# EAGLE board finalboard (EAGLE 8.7.1)
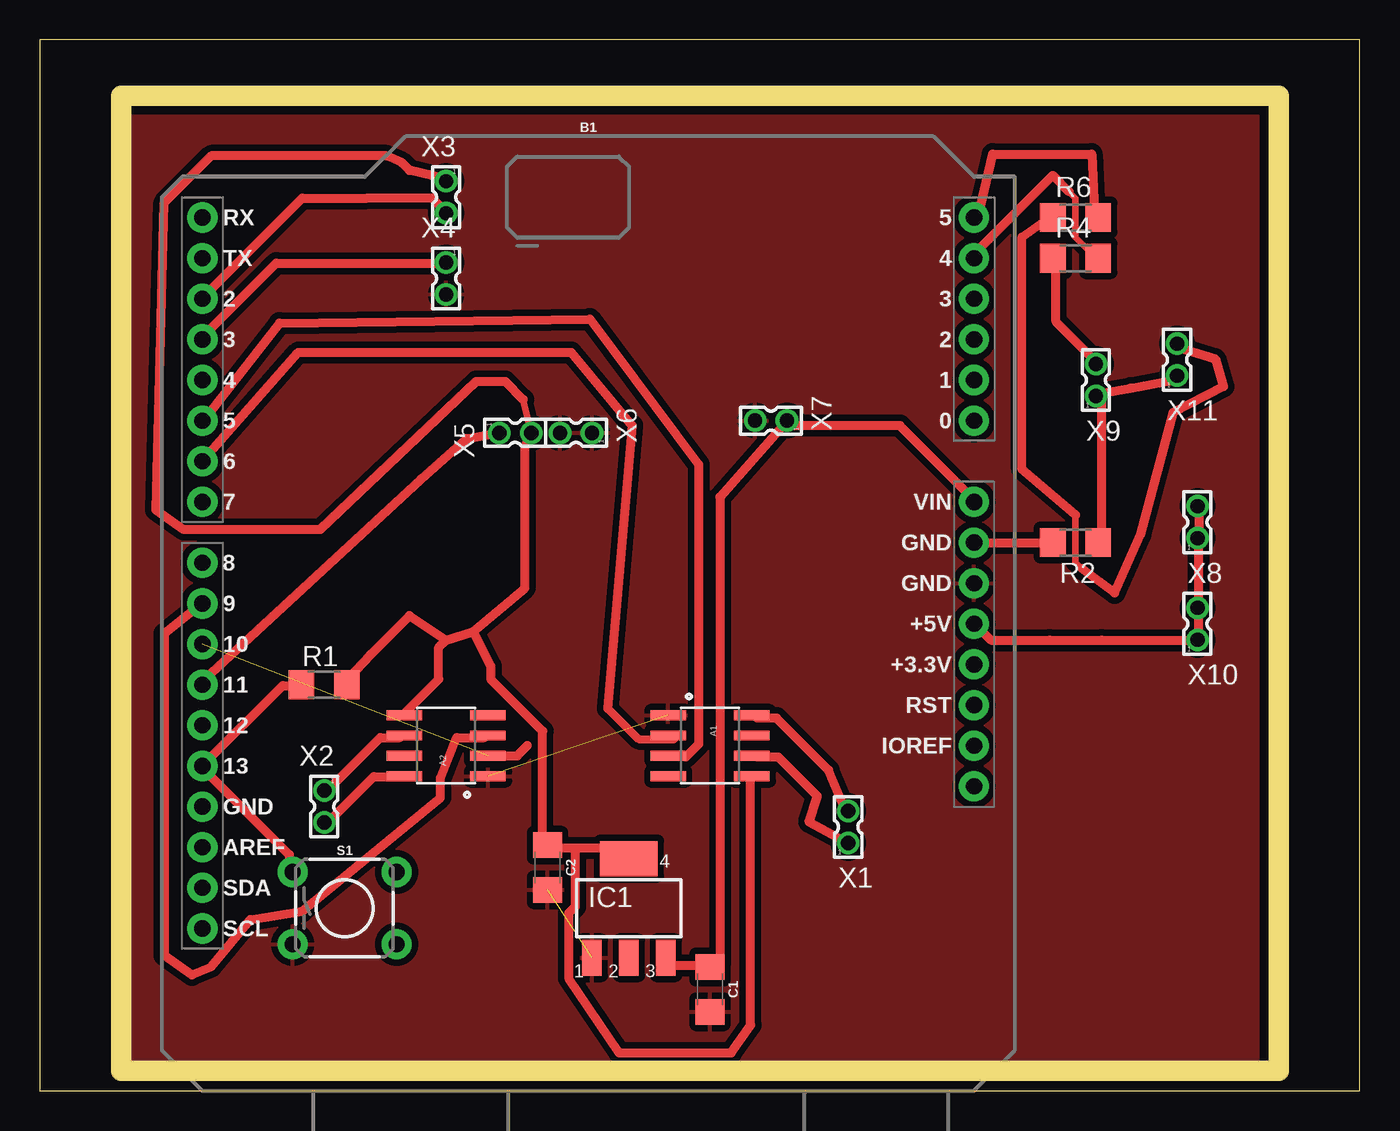
[diagram p0: board, top side]

Size 82.53 x 65.71 mm. Coordinates in mm from the lower left corner, seen from the top.
Outline: 0,0 82.53,0 82.53,65.71 0,65.71 0,0
Copper layers (1*16): Top 0.035mm / dielectric 1.5mm / Bottom 0.035mm
Design rules "default *": minimum track width 16mil, minimum drill 0.35mm, track to track 16mil, track to pad 16mil, pad to pad 16mil, via to via 16mil, smd to smd 16mil, copper to edge 40mil, drill to drill 6mil, minimum pad ring 10mil, minimum via ring 8mil, stop-mask expansion 4mil, vias tented up to drill 0mil, thermal gap 16mil
Milling: 4 lines

## Footprints (pad centres in the part's own frame; a part is rotated, then mirrored left to right if it is on the bottom)
SO08 = smd 0.61 x 2.21: 1 -1.905,-2.616; 2 -0.635,-2.616; 3 0.635,-2.616; 4 1.905,-2.616; 5 1.905,2.616; 6 0.635,2.616; 7 -0.635,2.616; 8 -1.905,2.616
UNO_R3_SHIELD = drill 1.016 pad 1.88: 3.3V 24.13,-2.54; 5V 24.13,0; A0 24.13,12.7; A1 24.13,15.24; A2 24.13,17.78; A3 24.13,20.32; A4 24.13,22.86; A5 24.13,25.4; AREF -24.13,-13.97; D2 -24.13,20.32; D3 -24.13,17.78; D4 -24.13,15.24; D5 -24.13,12.7; D6 -24.13,10.16; D7 -24.13,7.62; D8 -24.13,3.81; D9 -24.13,1.27; D10 -24.13,-1.27; D11 -24.13,-3.81; D12 -24.13,-6.35; D13 -24.13,-8.89; GND@0 24.13,2.54; GND@1 24.13,5.08; GND@2 -24.13,-11.43; IOREF 24.13,-7.62; NC 24.13,-10.16; RES 24.13,-5.08; RX -24.13,25.4; SCL -24.13,-19.05; SDA -24.13,-16.51; TX -24.13,22.86; VIN 24.13,7.62
1206 = smd 1.6 x 1.8: 1 -1.4,0; 2 1.4,0
SOT223 = smd 1.219 x 2.235: 1 -2.311,-3.099; 2 0,-3.099; 3 2.311,-3.099 | smd 3.6 x 2.2: 4 0,3.099
R1206 = smd 1.6 x 1.803: 1 -1.422,0; 2 1.422,0
TACTILE_SWITCH_PTH_6.0MM = drill 1.016 pad 1.88: 1 -3.251,2.261; 2 3.251,2.261; 3 -3.251,-2.261; 4 3.251,-2.261
332-02 = drill 0.9 pad 1.27: 1 0,-1; 2 0,1

## Placement (x,y rotation side)
A1  [SO08]  41.91,21.59 270 top
A2  [SO08]  25.4,21.59 90 top
B1  ARDUINO_UNO_R3_SHIELDBASIC  [UNO_R3_SHIELD]  34.29,29.21 0 top
C1  10uF  [1206]  41.91,6.35 270 top
C2  10uF  [1206]  31.75,13.97 270 top
IC1  317EMP  [SOT223]  36.83,11.43 0 top
R1  R-US_R1206  [R1206]  17.78,25.4 0 top
R2  [R1206]  64.77,34.29 180 top
R4  [R1206]  64.77,52.07 0 top
R6  [R1206]  64.77,54.61 0 top
S1  MOMENTARY-SWITCH-SPST-PTH-6.0MM  [TACTILE_SWITCH_PTH_6.0MM]  19.05,11.43 0 top
X1  332-02  [332-02]  50.55,16.51 0 top
X2  332-02  [332-02]  17.78,17.78 180 top
X3  332-02  [332-02]  25.4,55.88 180 top
X4  332-02  [332-02]  25.4,50.8 180 top
X5  332-02  [332-02]  29.72,41.15 270 top
X6  332-02  [332-02]  33.53,41.15 90 top
X7  332-02  [332-02]  45.72,41.91 90 top
X8  332-02  [332-02]  72.39,35.56 0 top
X9  332-02  [332-02]  66.04,44.45 0 top
X10  332-02  [332-02]  72.39,29.21 0 top
X11  332-02  [332-02]  71.12,45.72 0 top

## Library data of the parts
A1 A2 = SparkFun-IC-Power
B1 = SparkFun-Boards
C1 C2 = SparkFun-Capacitors; PROD_ID: CAP-10057
IC1 = linear
R1 = audio amplifier example
R2 R4 R6 = eagle-ltspice; SPICEMODEL: NONE; SPICEPREFIX: R
S1 = SparkFun-Switches; PROD_ID: SWCH-08441; SF_SKU: COM-00097
X1-X11 = con-garry

## Nets
+5V: A1.5 A2.5 C2.1 IC1.4 R1.2 X3.1 X5.2
GND: A1.1 A2.1 B1.GND@0 C1.2 C2.2 IC1.1 S1.3 X4.2 X6.1 X6.2 X7.2
N$1: A1.3 B1.D5
N$2: A1.2 B1.D6
N$3: A2.3 B1.D9
N$4: A2.2 B1.D10
N$5: A1.6 X1.1
N$6: A1.8 X1.2
N$7: A2.6 X2.1
N$8: A2.8 X2.2
N$9: B1.D3 X4.1
N$11: B1.D11 X5.1
N$12: B1.D13 R1.1 S1.1
N$13: B1.A4 R4.2
N$15: R2.1 X9.1 X11.1
N$16: B1.GND@1 R2.2
N$17: R4.1 X9.2
N$18: B1.5V X8.1 X8.2 X10.1 X10.2
N$19: B1.A5 R6.2
N$20: R6.1 X11.2
N$21: B1.D2 X3.2
VCC: B1.VIN C1.1 IC1.3 X7.1

## Tracks (layer width: path | path; a pad name or v marks a point on that pad's centre or on a via)
+5V
  Top 0.406: 25.35,57.05 X3.1 | 30.23,43.23 X5.2 | 19.25,25.76 R1.2 | 36.32,15.19 36.73,14.78 IC1.4 | 31.85,15.19 C2.1 31.45,15.6 | 44.45,19.66 A1.5 | 22.91,23.72 A2.5
  Top 0.559: 25.35,57.05 23.11,57.56 22.61,58.06 21.69,58.47 10.72,58.47 7.77,55.52 7.26,36.32 8.99,35.1 17.53,35.1 27.28,44.35 29.11,44.35 30.23,43.23 | 19.25,25.76 20.68,27.28 23.11,29.72 25.4,28.19 | 25.4,28.19 27.08,28.7 | 36.32,15.19 33.48,15.19 | 33.48,15.19 31.85,15.19 | 44.45,19.66 44.45,4.11 43.23,2.39 36.22,2.39 33.07,7.06 33.07,11.12 33.48,11.53 33.48,15.19 | 31.45,15.6 31.45,22.5 28.19,25.76 28.19,26.57 27.08,28.7 | 27.08,28.7 30.33,31.44 30.33,40.28 X5.2 | 22.91,23.72 24.94,25.76 24.94,27.74 25.4,28.19
GND  (2 unrouted)
  pour Top: 5.08,60.96 76.2,60.96 76.2,1.27 5.08,1.27
N$1
  Top 0.406: 40.39,20.88 39.57,20.88 A1.3 | 10.31,42.01 B1.D5
  Top 0.559: 40.39,20.88 41.2,21.69 41.2,39.17 34.39,48.26 14.99,48.01 10.31,42.01
N$2
  Top 0.406: 39.68,22 A1.2
  Top 0.508: 39.68,22 37.44,22 35.51,23.93
  Top 0.559: 35.51,23.93 37.03,41.61 33.22,46.18 16.15,46.18 B1.D6
N$3
  Top 0.406: 27.79,22.1 A2.3
  Top 0.559: 27.79,22.1 26.06,22.1 25.04,19.56 25.04,18.34 16.41,11.23 13.16,10.72 10.72,7.77 9.5,7.26 7.77,8.48 7.77,28.6 B1.D9
N$4  (1 unrouted)
  Top 0.559: 30.48,21.59 29.85,20.96 A2.2
N$5
  Top 0.406: 44.86,20.88 A1.6 | 50.34,15.6 X1.1
  Top 0.559: 44.86,20.88 46.18,20.88 48.62,18.44 48.11,16.82 50.34,15.6
N$6
  Top 0.406: 44.86,23.32 A1.8 | 50.34,17.63 X1.2
  Top 0.559: 44.86,23.32 46.08,23.32 49.33,20.07 50.34,17.63
N$7
  Top 0.406: 22.5,22.1 A2.6 | 18.03,18.85 X2.1
  Top 0.559: 22.5,22.1 21.29,22.1 18.03,18.85
N$8
  Top 0.406: 22.5,19.66 A2.8 | 18.03,16.82 X2.2
  Top 0.559: 22.5,19.66 20.88,19.66 18.03,16.82
N$9
  Top 0.406: 25.35,51.77 X4.1 | 10.31,47.3 B1.D3
  Top 0.559: 25.35,51.77 14.78,51.77 10.31,47.3
N$11
  Top 0.559: X5.1 26.67,40.79 23.83,38.25 10.31,25.76 B1.D11
N$12
  Top 0.406: 16,25.35 R1.1
  Top 0.559: 16,25.35 15.19,25.35 B1.D13 10.31,20.07 15.6,14.78 15.6,13.97 S1.1
N$13
  Top 0.406: 64.36,56.24 64.77,55.83 64.77,53.39 65.99,52.17 R4.2 | 58.78,52.68 B1.A4
  Top 0.559: 64.36,56.24 63.35,57.25 58.78,52.68
N$15
  Top 0.406: 66.4,34.29 R2.1 | 66.4,43.23 X9.1 66.4,43.64 | 70.87,44.45 X11.1
  Top 0.559: 66.4,43.23 66.4,34.29 | 70.87,44.45 68.22,43.94 66.4,43.64
N$16
  Top 0.559: B1.GND@1 R2.2
N$17
  Top 0.406: 63.55,51.77 R4.1 | 65.99,45.67 X9.2
  Top 0.559: 63.55,51.77 63.55,48.11 65.99,45.67
N$18
  Top 0.406: 58.67,29.01 B1.5V | 72.49,34.7 X8.1 72.49,34.29 | 72.49,36.32 X8.2 | 72.09,28.19 X10.1 72.49,28.6 | 72.49,29.82 X10.2 72.49,30.23
  Top 0.559: 58.67,29.01 59.49,28.19 63.14,28.19 66.4,28.19 72.09,28.19 | 72.49,36.32 72.49,34.7 | 72.49,28.6 72.49,29.82 | 72.49,30.23 72.49,34.29
N$19
  Top 0.406: 65.99,54.3 65.99,54.61 R6.2 | 58.67,54.61 B1.A5
  Top 0.559: 65.99,54.3 65.79,58.57 59.59,58.57 58.67,54.61
N$20
  Top 0.406: 64.77,36.02 64.77,33.07 65.18,32.66 | 63.14,54.61 R6.1 | 71.27,46.48 X11.2
  Top 0.508: 61.42,53.39 63.14,54.61
  Top 0.559: 61.42,53.39 61.42,38.86 64.77,36.02 | 65.18,32.66 67.21,31.14 68.83,34.8 70.87,42.42 74.02,44.04 73.51,45.77 71.27,46.48
N$21
  Top 0.406: 25.35,55.02 X3.2 | 10.31,49.73 B1.D2
  Top 0.559: 25.35,55.02 24.54,55.83 21.08,55.83 20.47,55.83 16.41,55.83 10.31,49.73
VCC
  Top 0.406: 39.57,7.87 39.17,8.28 IC1.3 | 41.61,7.87 C1.1 42.52,7.87 | 46.89,41.61 X7.1 | 58.27,37.14 B1.VIN
  Top 0.559: 39.57,7.87 41.61,7.87 | 46.89,41.61 53.8,41.61 58.27,37.14 | 42.52,7.87 42.52,37.14 46.48,41.61 X7.1